# Altium PCB PCB.PcbDoc
Units mm, origin at the board's own origin, x right, y up, seen from the top; angles counter-clockwise.
Board outline 123.2 x 84.82 mm, 4 copper layers (Top Layer, Int1, Int2, Bottom Layer), stack 1.036 mm thick; 1 components, 0 nets, 182 pads, 0 vias.
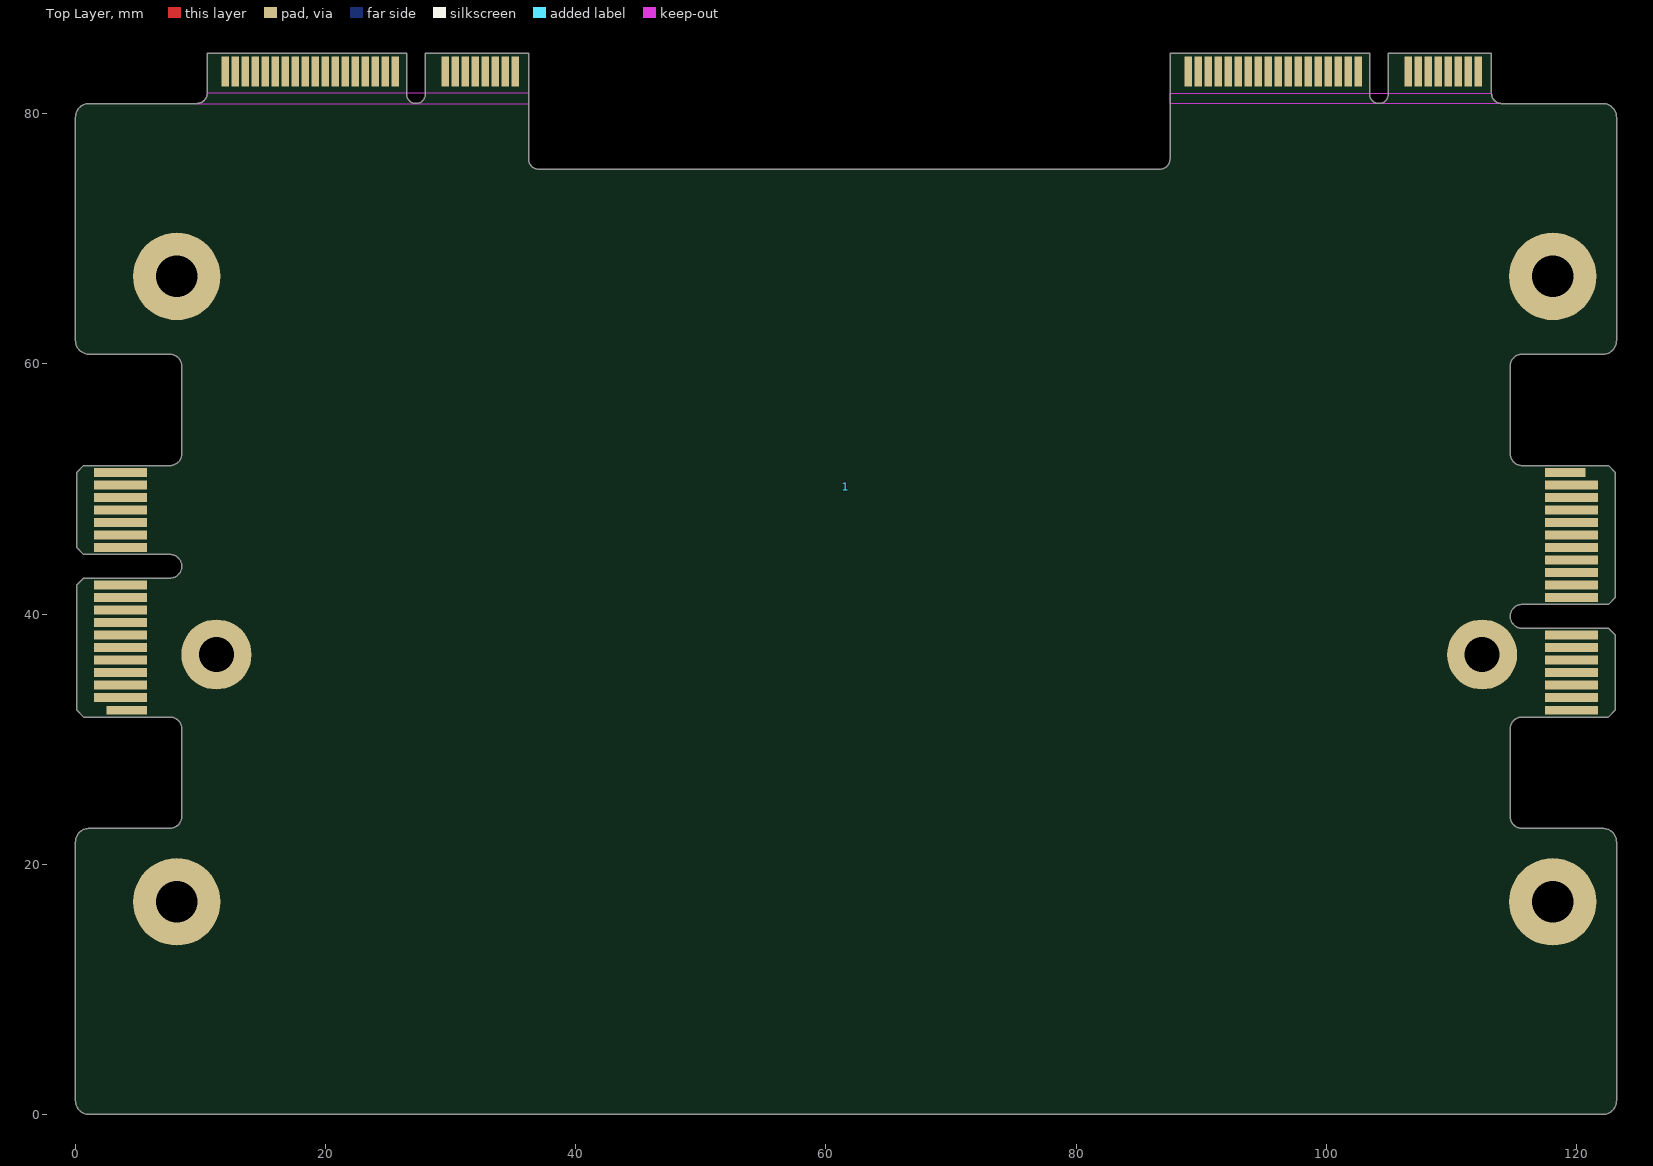
[diagram p0: Top Layer view]
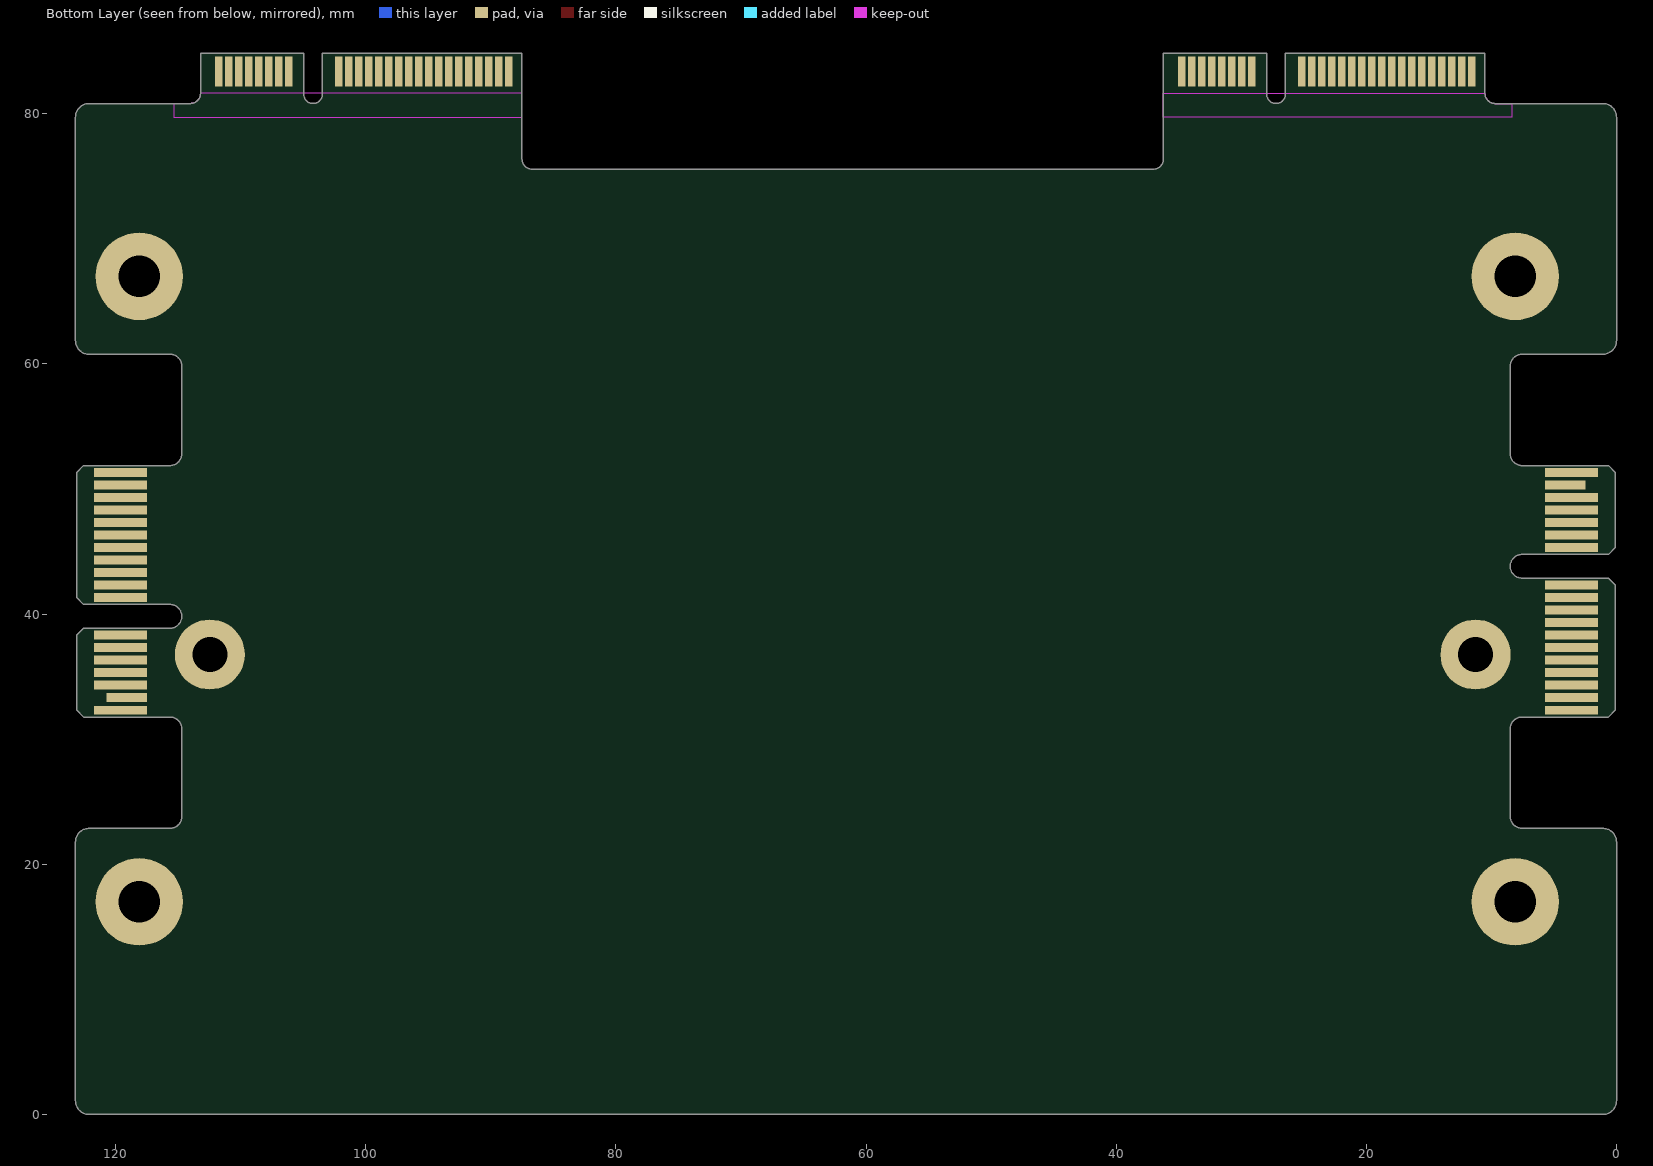
[diagram p1: Bottom Layer view, seen from below]

## Layer stack, top to bottom
Top Solder: solder mask 0.0254, SM-001, Dk 3.5
Top Layer: signal copper 0.018
Dielectric 1: prepreg 0.127, FR4, Dk 4.2
Int1: signal copper 0.018
Dielectric 2: core 0.71, FR4, Dk 4.6
Int2: signal copper 0.018
Dielectric 3: prepreg 0.127, FR4, Dk 4.2
Bottom Layer: signal copper 0.018
Bottom Solder: solder mask 0.0254, SM-001, Dk 3.5

## Board outline
0,1.1 ccw(c1.1,1.1) 1.1,0 122.1,0 ccw(c122.1,1.1) 123.2,1.1 123.2,21.775 ccw(c122.1,21.775) 122.1,22.875 115.65,22.875 cw(c115.65,23.825) 114.7,23.825 114.7,30.825 cw(c115.65,30.825) 115.65,31.775 122.55,31.775 123.1,32.325 123.1,38.325 122.55,38.875 115.65,38.875 cw(c115.65,39.825) 115.65,40.775 122.55,40.775 123.1,41.325 123.1,51.325 122.55,51.875 115.65,51.875 cw(c115.65,52.825) 114.7,52.825 114.7,59.825 cw(c115.65,59.825) 115.65,60.775 122.1,60.775 ccw(c122.1,61.875) 123.2,61.875 123.2,79.722 ccw(c122.1,79.722) 122.1,80.822 114.004,80.822 cw(c114.004,81.622) 113.204,81.622 113.204,84.822 104.954,84.822 104.954,81.572 cw(c104.204,81.572) 103.454,81.572 103.454,84.822 87.504,84.822 87.504,76.375 cw(c86.704,76.375) 86.704,75.575 37.019,75.575 cw(c37.019,76.375) 36.219,76.375 36.219,84.822 27.969,84.822 27.969,81.572 cw(c27.219,81.572) 26.469,81.572 26.469,84.822 10.519,84.822 10.519,81.622 cw(c9.72,81.621) 9.719,80.822 1.1,80.822 ccw(c1.1,79.722) 0,79.722 0,61.875 ccw(c1.1,61.875) 1.1,60.775 7.55,60.775 cw(c7.55,59.825) 8.5,59.825 8.5,52.825 cw(c7.55,52.825) 7.55,51.875 0.65,51.875 0.1,51.325 0.1,45.325 0.65,44.775 7.55,44.775 cw(c7.55,43.825) 7.55,42.875 0.65,42.875 0.1,42.325 0.1,32.325 0.65,31.775 7.55,31.775 cw(c7.55,30.825) 8.5,30.825 8.5,23.825 cw(c7.55,23.825) 7.55,22.875 1.1,22.875 ccw(c1.1,21.775) 0,21.775

## Design rules (kind name [scope] priority, off if disabled: settings)
Clearance [All] p1: gap=0.254 ignorepadtopadclearanceinfootprint=FALSE
PolygonConnect [All] p1: connectstyle=Relief reliefconductorwidth=0.254 reliefentries=4 polygonreliefangle="90 Angle" airgapwidth=0.254
RoutingVias [All] p1: holewidth=0.711 width=1.27 viastyle="Through Hole" minholewidth=0.711 minwidth=1.27 maxholewidth=0.711 maxwidth=1.27
SolderMaskExpansion [All] p1: expansion=0 istentingtop=FALSE
Width [All] p1: maxlimit=0.254 minlimit=0.254 preferedwidth=0.254
30 further rules are at their usual default settings.

## Components (designator, comment, footprint, x,y, rotation, side; value= is the part's Value field where it differs from the comment)
1 "CARD-2xMPCIE-2xPCIE" CARD-2xMPCIE-2xPCIE 27.219,84.822 r0 top locked

## Footprints (in the part's own frame and the unit in brackets; to place one, negate y for a bottom-side part, rotate by r counter-clockwise, add the part's x,y. Pads: shape width x height; smd on the part's side, far side on the other; paste and mask are expansions set on the pad)
CARD-2xMPCIE-2xPCIE [mm]
  round 5.6 hole 2.8 mask+0.1: G1(-15.95,-48.05) G2(85.235,-48.05)
  rect 0.6x2.4 smd: L-1(7.95,-1.45) L-3(7.15,-1.45) L-5(6.35,-1.45) L-7(5.55,-1.45) L-9(4.75,-1.45) L-11(3.95,-1.45) L-13(3.15,-1.45) L-15(2.35,-1.45) L-17(-1.65,-1.45) L-19(-2.45,-1.45) L-21(-3.25,-1.45) L-23(-4.05,-1.45) L-25(-4.85,-1.45) L-27(-5.65,-1.45) L-29(-6.45,-1.45) L-31(-7.25,-1.45) L-33(-8.05,-1.45) L-35(-8.85,-1.45) L-37(-9.65,-1.45) L-39(-10.45,-1.45) L-41(-11.25,-1.45) L-43(-12.05,-1.45) L-45(-12.85,-1.45) L-47(-13.65,-1.45) L-49(-14.45,-1.45) L-51(-15.25,-1.45) R-1(84.935,-1.45) R-3(84.135,-1.45) R-5(83.335,-1.45) R-7(82.535,-1.45) R-9(81.735,-1.45) R-11(80.935,-1.45) R-13(80.135,-1.45) R-15(79.335,-1.45) R-17(75.335,-1.45) R-19(74.535,-1.45) R-21(73.735,-1.45) R-23(72.935,-1.45) R-25(72.135,-1.45) R-27(71.335,-1.45) R-29(70.535,-1.45) R-31(69.735,-1.45) R-33(68.935,-1.45) R-35(68.135,-1.45) R-37(67.335,-1.45) R-39(66.535,-1.45) R-41(65.735,-1.45) R-43(64.935,-1.45) R-45(64.135,-1.45) R-47(63.335,-1.45) R-49(62.535,-1.45) R-51(61.735,-1.45)
  rect 0.6x2.4 smd far side: L-2(7.55,-1.45) L-4(6.75,-1.45) L-6(5.95,-1.45) L-8(5.15,-1.45) L-10(4.35,-1.45) L-12(3.55,-1.45) L-14(2.75,-1.45) L-16(1.95,-1.45) L-18(-2.05,-1.45) L-20(-2.85,-1.45) L-22(-3.65,-1.45) L-24(-4.45,-1.45) L-26(-5.25,-1.45) L-28(-6.05,-1.45) L-30(-6.85,-1.45) L-32(-7.65,-1.45) L-34(-8.45,-1.45) L-36(-9.25,-1.45) L-38(-10.05,-1.45) L-40(-10.85,-1.45) L-42(-11.65,-1.45) L-44(-12.45,-1.45) L-46(-13.25,-1.45) L-48(-14.05,-1.45) L-50(-14.85,-1.45) L-52(-15.65,-1.45) R-2(84.535,-1.45) R-4(83.735,-1.45) R-6(82.935,-1.45) R-8(82.135,-1.45) R-10(81.335,-1.45) R-12(80.535,-1.45) R-14(79.735,-1.45) R-16(78.935,-1.45) R-18(74.935,-1.45) R-20(74.135,-1.45) R-22(73.335,-1.45) R-24(72.535,-1.45) R-26(71.735,-1.45) R-28(70.935,-1.45) R-30(70.135,-1.45) R-32(69.335,-1.45) R-34(68.535,-1.45) R-36(67.735,-1.45) R-38(66.935,-1.45) R-40(66.135,-1.45) R-42(65.335,-1.45) R-44(64.535,-1.45) R-46(63.735,-1.45) R-48(62.935,-1.45) R-50(62.135,-1.45) R-52(61.335,-1.45)
  rect 3.2x0.7 smd paste-2539.97 mask+0: L-A1(-23.119,-52.497) R-A1(91.881,-33.497)
  rect 4.2x0.7 smd paste-2539.97 mask+0: L-A2(-23.619,-51.497) L-A3(-23.619,-50.497) L-A4(-23.619,-49.497) L-A5(-23.619,-48.497) L-A6(-23.619,-47.497) L-A7(-23.619,-46.497) L-A8(-23.619,-45.497) L-A9(-23.619,-44.497) L-A10(-23.619,-43.497) L-A11(-23.619,-42.497) L-A12(-23.619,-39.497) L-A13(-23.619,-38.497) L-A14(-23.619,-37.497) L-A15(-23.619,-36.497) L-A16(-23.619,-35.497) L-A17(-23.619,-34.497) L-A18(-23.619,-33.497) R-A2(92.381,-34.497) R-A3(92.381,-35.497) R-A4(92.381,-36.497) R-A5(92.381,-37.497) R-A6(92.381,-38.497) R-A7(92.381,-39.497) R-A8(92.381,-40.497) R-A9(92.381,-41.497) R-A10(92.381,-42.497) R-A11(92.381,-43.497) R-A12(92.381,-46.497) R-A13(92.381,-47.497) R-A14(92.381,-48.497) R-A15(92.381,-49.497) R-A16(92.381,-50.497) R-A17(92.381,-51.497) R-A18(92.381,-52.497)
  rect 4.2x0.7 smd far side paste-2539.97 mask+0: L-B1(-23.619,-52.497) L-B2(-23.619,-51.497) L-B3(-23.619,-50.497) L-B4(-23.619,-49.497) L-B5(-23.619,-48.497) L-B6(-23.619,-47.497) L-B7(-23.619,-46.497) L-B8(-23.619,-45.497) L-B9(-23.619,-44.497) L-B10(-23.619,-43.497) L-B11(-23.619,-42.497) L-B12(-23.619,-39.497) L-B13(-23.619,-38.497) L-B14(-23.619,-37.497) L-B15(-23.619,-36.497) L-B16(-23.619,-35.497) L-B18(-23.619,-33.497) R-B1(92.381,-33.497) R-B2(92.381,-34.497) R-B3(92.381,-35.497) R-B4(92.381,-36.497) R-B5(92.381,-37.497) R-B6(92.381,-38.497) R-B7(92.381,-39.497) R-B8(92.381,-40.497) R-B9(92.381,-41.497) R-B10(92.381,-42.497) R-B11(92.381,-43.497) R-B12(92.381,-46.497) R-B13(92.381,-47.497) R-B14(92.381,-48.497) R-B15(92.381,-49.497) R-B16(92.381,-50.497) R-B18(92.381,-52.497)
  rect 3.2x0.7 smd far side paste-2539.97 mask+0: L-B17(-23.119,-34.497) R-B17(91.881,-51.497)
  round 7 hole 3.3 mask+0.1: MN-1(-19.12,-17.82) MN-2(-19.12,-67.82) MN-3(90.885,-17.82) MN-4(90.885,-67.82)
  Top Layer keep-out region: 85.985,-3.2 85.989,-3.278 86.019,-3.432 86.079,-3.577 86.166,-3.708 86.277,-3.818 86.408,-3.906 86.553,-3.966 86.706,-3.996 86.785,-4 60.285,-4 60.285,-3.2
  Top Layer keep-out region: -16.7,-3.2 -16.704,-3.278 -16.734,-3.432 -16.794,-3.577 -16.882,-3.708 -16.992,-3.818 -17.123,-3.906 -17.268,-3.966 -17.422,-3.996 -17.5,-4 9,-4 9,-3.2
  Bottom Layer keep-out region: 85.985,-3.2 85.989,-3.278 86.019,-3.432 86.079,-3.577 86.166,-3.708 86.277,-3.818 86.408,-3.906 86.553,-3.966 86.706,-3.996 86.785,-4 88.135,-4 88.135,-5.1 60.285,-5.1 60.285,-3.2
  Bottom Layer keep-out region: -16.7,-3.2 -16.704,-3.278 -16.734,-3.432 -16.794,-3.577 -16.882,-3.708 -16.992,-3.818 -17.123,-3.906 -17.268,-3.966 -17.422,-3.996 -17.5,-4 -18.85,-4 -18.85,-5.1 9,-5.1 9,-3.2

## Part data
1: library part PCB-CARD-MODULE

## Nets (pads, with @x,y where several pads share a name; then routed paths per layer and width w, separated by ;. In a path a pad name is that pad's centre, name@x,y a point inside that pad or via, vN(x,y) a via of type N, cw(c..) or ccw(c..) an arc to the next point about the centre after c; other vN are vias at no path point)
pads on no net: 1.G1 1.G2 1.L-1 1.L-2 1.L-3 1.L-4 1.L-5 1.L-6 1.L-7 1.L-8 1.L-9 1.L-10 1.L-11 1.L-12 1.L-13 1.L-14 1.L-15 1.L-16 1.L-17 1.L-18 1.L-19 1.L-20 1.L-21 1.L-22 1.L-23 1.L-24 1.L-25 1.L-26 1.L-27 1.L-28 1.L-29 1.L-30 1.L-31 1.L-32 1.L-33 1.L-34 1.L-35 1.L-36 1.L-37 1.L-38 1.L-39 1.L-40 1.L-41 1.L-42 1.L-43 1.L-44 1.L-45 1.L-46 1.L-47 1.L-48 1.L-49 1.L-50 1.L-51 1.L-52 1.L-A1 1.L-A2 1.L-A3 1.L-A4 1.L-A5 1.L-A6 1.L-A7 1.L-A8 1.L-A9 1.L-A10 1.L-A11 1.L-A12 1.L-A13 1.L-A14 1.L-A15 1.L-A16 1.L-A17 1.L-A18 1.L-B1 1.L-B2 1.L-B3 1.L-B4 1.L-B5 1.L-B6 1.L-B7 1.L-B8 1.L-B9 1.L-B10 1.L-B11 1.L-B12 1.L-B13 1.L-B14 1.L-B15 1.L-B16 1.L-B17 1.L-B18 1.MN-1 1.MN-2 1.MN-3 1.MN-4 1.R-1 1.R-2 1.R-3 1.R-4 1.R-5 1.R-6 1.R-7 1.R-8 1.R-9 1.R-10 1.R-11 1.R-12 1.R-13 1.R-14 1.R-15 1.R-16 1.R-17 1.R-18 1.R-19 1.R-20 1.R-21 1.R-22 1.R-23 1.R-24 1.R-25 1.R-26 1.R-27 1.R-28 1.R-29 1.R-30 1.R-31 1.R-32 1.R-33 1.R-34 1.R-35 1.R-36 1.R-37 1.R-38 1.R-39 1.R-40 1.R-41 1.R-42 1.R-43 1.R-44 1.R-45 1.R-46 1.R-47 1.R-48 1.R-49 1.R-50 1.R-51 1.R-52 1.R-A1 1.R-A2 1.R-A3 1.R-A4 1.R-A5 1.R-A6 1.R-A7 1.R-A8 1.R-A9 1.R-A10 1.R-A11 1.R-A12 1.R-A13 1.R-A14 1.R-A15 1.R-A16 1.R-A17 1.R-A18 1.R-B1 1.R-B2 1.R-B3 1.R-B4 1.R-B5 1.R-B6 1.R-B7 1.R-B8 1.R-B9 1.R-B10 1.R-B11 1.R-B12 1.R-B13 1.R-B14 1.R-B15 1.R-B16 1.R-B17 1.R-B18